# EAGLE board ADXL362_BOB_Panel_v10 (EAGLE 6.5.0), part 1 of 2
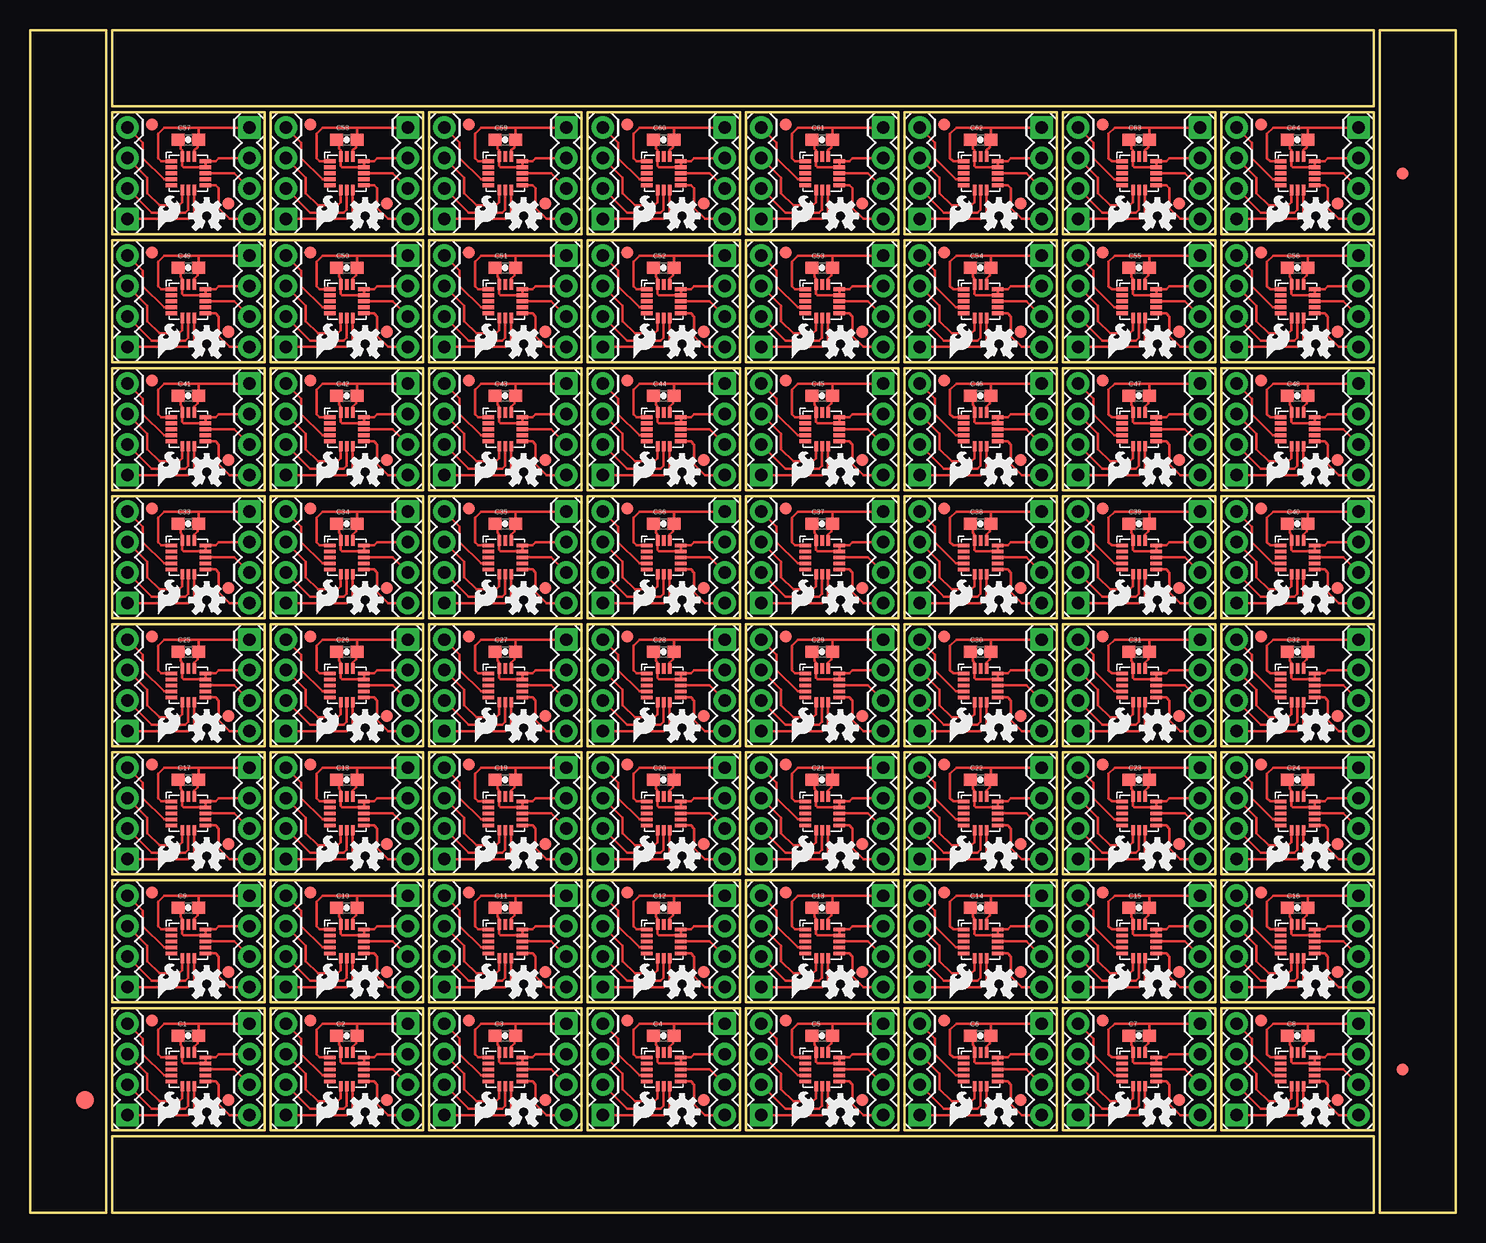
[diagram p0: board, top side]
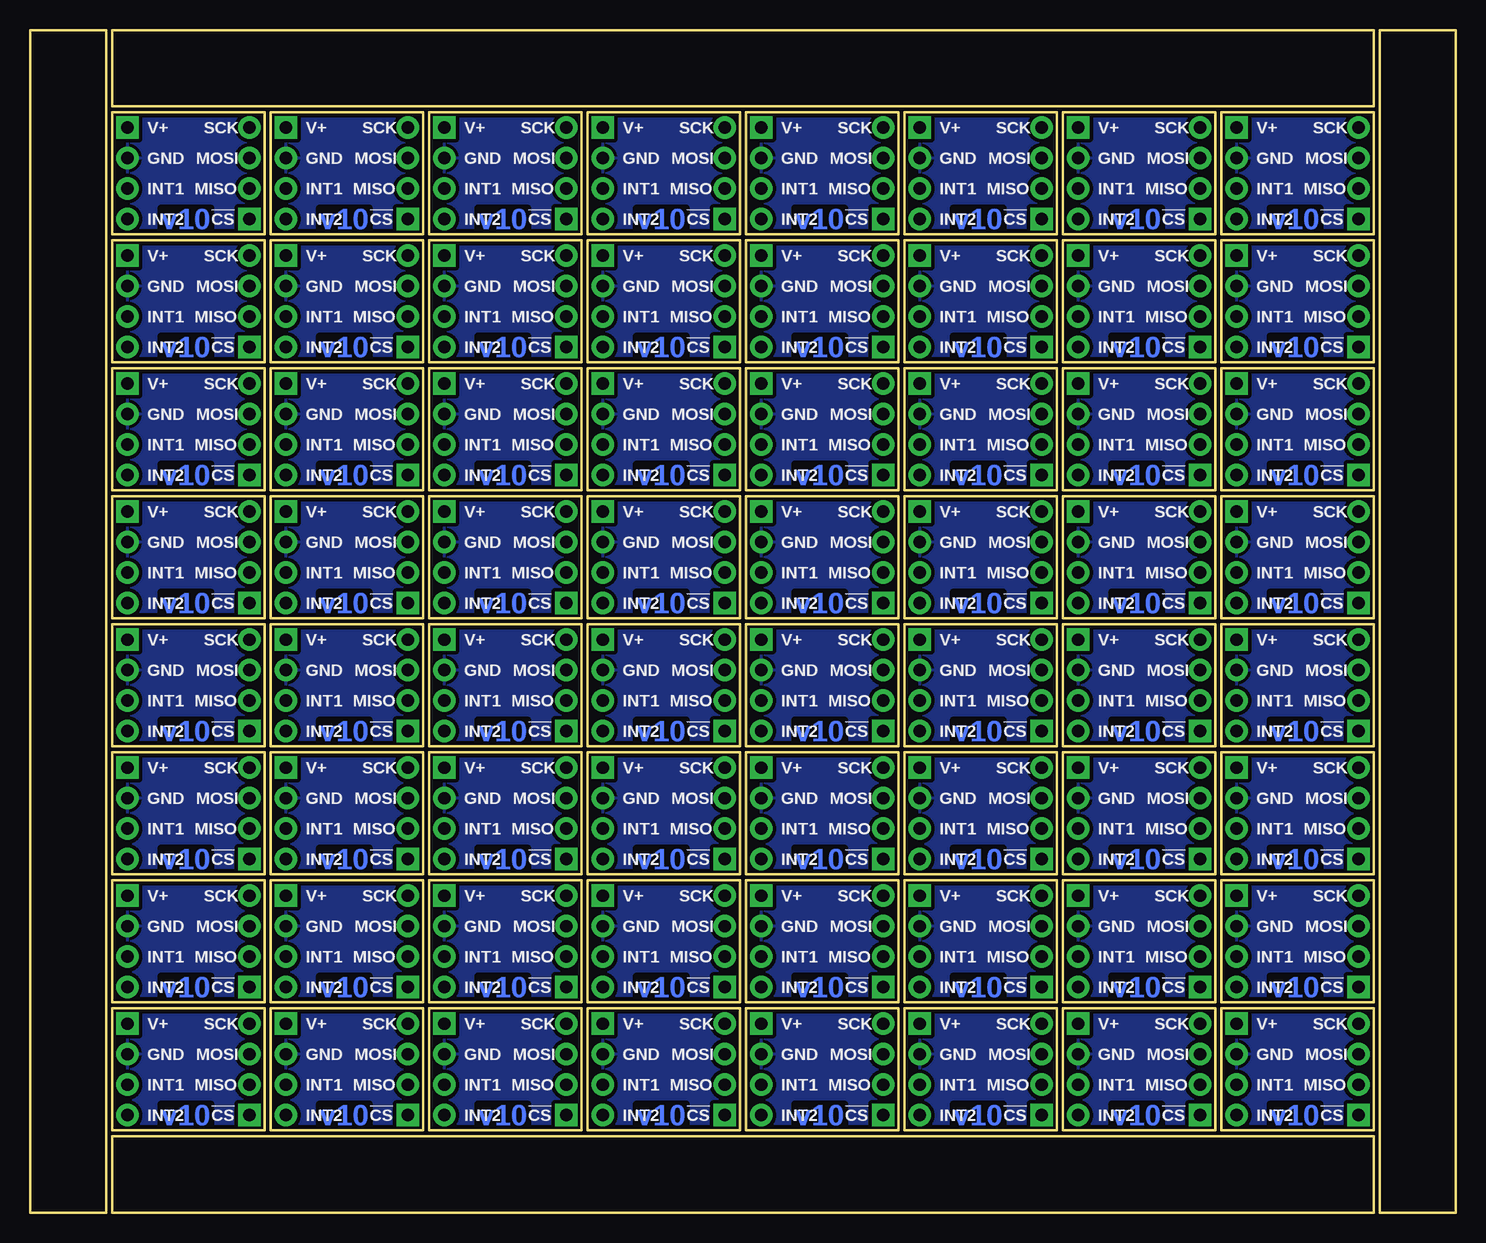
[diagram p1: board, bottom side, seen from below]

Size 118.87 x 98.55 mm. Coordinates in mm from the lower left corner, seen from the top.
Outline: 276 segments
Copper layers (1*16): Top 0.035mm / dielectric 1.5mm / Bottom 0.035mm
Design rules "SparkFun-2-layer": minimum track width 7mil, minimum drill 15mil, track to track 8mil, track to pad 8mil, pad to pad 8mil, via to via 8mil, smd to smd 8mil, copper to edge 8mil, drill to drill 8mil, minimum pad ring 12mil, minimum via ring 10mil, stop-mask expansion 4mil, vias tented up to drill 20mil, thermal gap 10mil

## Footprints (pad centres in the part's own frame; a part is rotated, then mirrored left to right if it is on the bottom)
0603-CAP = smd 1.1 x 1: 1 -0.85,0; 2 0.85,0
FIDUCIAL-1.5X3 = smd 1.5 x 1.5: 1 0,0
FIDUCIAL-1X2 = smd 1 x 1: 1 0,0
1X04 = drill 1.016 pad 1.88 square: 1 0,0 | drill 1.016 pad 1.88: 2 2.54,0; 3 5.08,0; 4 7.62,0
ADXL362-1:1 = smd 0.952 x 0.3: P$1 -1.426,1; P$2 -1.426,0.5; P$3 -1.426,0; P$4 -1.426,-0.5; P$5 -1.426,-1; P$9 1.426,-1; P$10 1.426,-0.5; P$11 1.426,0; P$12 1.426,0.5; P$13 1.426,1 | smd 0.3 x 0.851: P$6 -0.5,-1.402; P$7 0,-1.402; P$8 0.5,-1.402; P$14 0.5,1.402; P$15 0,1.402; P$16 -0.5,1.402

## Placement (x,y rotation side)
C1  .1uF  [0603-CAP]  13.21,14.73 0 top
C2  .1uF  [0603-CAP]  26.42,14.73 0 top
C3  .1uF  [0603-CAP]  39.62,14.73 0 top
C4  .1uF  [0603-CAP]  52.83,14.73 0 top
C5  .1uF  [0603-CAP]  66.04,14.73 0 top
C6  .1uF  [0603-CAP]  79.25,14.73 0 top
C7  .1uF  [0603-CAP]  92.46,14.73 0 top
C8  .1uF  [0603-CAP]  105.66,14.73 0 top
C9  .1uF  [0603-CAP]  13.21,25.4 0 top
C10  .1uF  [0603-CAP]  26.42,25.4 0 top
C11  .1uF  [0603-CAP]  39.62,25.4 0 top
C12  .1uF  [0603-CAP]  52.83,25.4 0 top
C13  .1uF  [0603-CAP]  66.04,25.4 0 top
C14  .1uF  [0603-CAP]  79.25,25.4 0 top
C15  .1uF  [0603-CAP]  92.46,25.4 0 top
C16  .1uF  [0603-CAP]  105.66,25.4 0 top
C17  .1uF  [0603-CAP]  13.21,36.07 0 top
C18  .1uF  [0603-CAP]  26.42,36.07 0 top
C19  .1uF  [0603-CAP]  39.62,36.07 0 top
C20  .1uF  [0603-CAP]  52.83,36.07 0 top
C21  .1uF  [0603-CAP]  66.04,36.07 0 top
C22  .1uF  [0603-CAP]  79.25,36.07 0 top
C23  .1uF  [0603-CAP]  92.46,36.07 0 top
C24  .1uF  [0603-CAP]  105.66,36.07 0 top
C25  .1uF  [0603-CAP]  13.21,46.74 0 top
C26  .1uF  [0603-CAP]  26.42,46.74 0 top
C27  .1uF  [0603-CAP]  39.62,46.74 0 top
C28  .1uF  [0603-CAP]  52.83,46.74 0 top
C29  .1uF  [0603-CAP]  66.04,46.74 0 top
C30  .1uF  [0603-CAP]  79.25,46.74 0 top
C31  .1uF  [0603-CAP]  92.46,46.74 0 top
C32  .1uF  [0603-CAP]  105.66,46.74 0 top
C33  .1uF  [0603-CAP]  13.21,57.4 0 top
C34  .1uF  [0603-CAP]  26.42,57.4 0 top
C35  .1uF  [0603-CAP]  39.62,57.4 0 top
C36  .1uF  [0603-CAP]  52.83,57.4 0 top
C37  .1uF  [0603-CAP]  66.04,57.4 0 top
C38  .1uF  [0603-CAP]  79.25,57.4 0 top
C39  .1uF  [0603-CAP]  92.46,57.4 0 top
C40  .1uF  [0603-CAP]  105.66,57.4 0 top
C41  .1uF  [0603-CAP]  13.21,68.07 0 top
C42  .1uF  [0603-CAP]  26.42,68.07 0 top
C43  .1uF  [0603-CAP]  39.62,68.07 0 top
C44  .1uF  [0603-CAP]  52.83,68.07 0 top
C45  .1uF  [0603-CAP]  66.04,68.07 0 top
C46  .1uF  [0603-CAP]  79.25,68.07 0 top
C47  .1uF  [0603-CAP]  92.46,68.07 0 top
C48  .1uF  [0603-CAP]  105.66,68.07 0 top
C49  .1uF  [0603-CAP]  13.21,78.74 0 top
C50  .1uF  [0603-CAP]  26.42,78.74 0 top
C51  .1uF  [0603-CAP]  39.62,78.74 0 top
C52  .1uF  [0603-CAP]  52.83,78.74 0 top
C53  .1uF  [0603-CAP]  66.04,78.74 0 top
C54  .1uF  [0603-CAP]  79.25,78.74 0 top
C55  .1uF  [0603-CAP]  92.46,78.74 0 top
C56  .1uF  [0603-CAP]  105.66,78.74 0 top
C57  .1uF  [0603-CAP]  13.21,89.41 0 top
C58  .1uF  [0603-CAP]  26.42,89.41 0 top
C59  .1uF  [0603-CAP]  39.62,89.41 0 top
C60  .1uF  [0603-CAP]  52.83,89.41 0 top
C61  .1uF  [0603-CAP]  66.04,89.41 0 top
C62  .1uF  [0603-CAP]  79.25,89.41 0 top
C63  .1uF  [0603-CAP]  92.46,89.41 0 top
C64  .1uF  [0603-CAP]  105.66,89.41 0 top
E$1  [FIDUCIAL-1.5X3]  4.57,9.4 0 top
E$4  [FIDUCIAL-1X2]  114.43,11.94 0 top
E$5  [FIDUCIAL-1X2]  114.43,86.61 180 top
FID1  FIDUCIAL1X2  [FIDUCIAL-1X2]  10.16,16 0 top
FID2  FIDUCIAL1X2  [FIDUCIAL-1X2]  16.54,9.4 0 top
FID3  FIDUCIAL1X2  [FIDUCIAL-1X2]  23.37,16 0 top
FID4  FIDUCIAL1X2  [FIDUCIAL-1X2]  29.74,9.4 0 top
FID5  FIDUCIAL1X2  [FIDUCIAL-1X2]  36.58,16 0 top
FID6  FIDUCIAL1X2  [FIDUCIAL-1X2]  42.95,9.4 0 top
FID7  FIDUCIAL1X2  [FIDUCIAL-1X2]  49.78,16 0 top
FID8  FIDUCIAL1X2  [FIDUCIAL-1X2]  56.16,9.4 0 top
FID9  FIDUCIAL1X2  [FIDUCIAL-1X2]  62.99,16 0 top
FID10  FIDUCIAL1X2  [FIDUCIAL-1X2]  69.37,9.4 0 top
FID11  FIDUCIAL1X2  [FIDUCIAL-1X2]  76.2,16 0 top
FID12  FIDUCIAL1X2  [FIDUCIAL-1X2]  82.58,9.4 0 top
FID13  FIDUCIAL1X2  [FIDUCIAL-1X2]  89.41,16 0 top
FID14  FIDUCIAL1X2  [FIDUCIAL-1X2]  95.78,9.4 0 top
FID15  FIDUCIAL1X2  [FIDUCIAL-1X2]  102.62,16 0 top
FID16  FIDUCIAL1X2  [FIDUCIAL-1X2]  108.99,9.4 0 top
FID17  FIDUCIAL1X2  [FIDUCIAL-1X2]  10.16,26.67 0 top
FID18  FIDUCIAL1X2  [FIDUCIAL-1X2]  16.54,20.07 0 top
FID19  FIDUCIAL1X2  [FIDUCIAL-1X2]  23.37,26.67 0 top
FID20  FIDUCIAL1X2  [FIDUCIAL-1X2]  29.74,20.07 0 top
FID21  FIDUCIAL1X2  [FIDUCIAL-1X2]  36.58,26.67 0 top
FID22  FIDUCIAL1X2  [FIDUCIAL-1X2]  42.95,20.07 0 top
FID23  FIDUCIAL1X2  [FIDUCIAL-1X2]  49.78,26.67 0 top
FID24  FIDUCIAL1X2  [FIDUCIAL-1X2]  56.16,20.07 0 top
FID25  FIDUCIAL1X2  [FIDUCIAL-1X2]  62.99,26.67 0 top
FID26  FIDUCIAL1X2  [FIDUCIAL-1X2]  69.37,20.07 0 top
FID27  FIDUCIAL1X2  [FIDUCIAL-1X2]  76.2,26.67 0 top
FID28  FIDUCIAL1X2  [FIDUCIAL-1X2]  82.58,20.07 0 top
FID29  FIDUCIAL1X2  [FIDUCIAL-1X2]  89.41,26.67 0 top
FID30  FIDUCIAL1X2  [FIDUCIAL-1X2]  95.78,20.07 0 top
FID31  FIDUCIAL1X2  [FIDUCIAL-1X2]  102.62,26.67 0 top
FID32  FIDUCIAL1X2  [FIDUCIAL-1X2]  108.99,20.07 0 top
FID33  FIDUCIAL1X2  [FIDUCIAL-1X2]  10.16,37.34 0 top
FID34  FIDUCIAL1X2  [FIDUCIAL-1X2]  16.54,30.73 0 top
FID35  FIDUCIAL1X2  [FIDUCIAL-1X2]  23.37,37.34 0 top
FID36  FIDUCIAL1X2  [FIDUCIAL-1X2]  29.74,30.73 0 top
FID37  FIDUCIAL1X2  [FIDUCIAL-1X2]  36.58,37.34 0 top
FID38  FIDUCIAL1X2  [FIDUCIAL-1X2]  42.95,30.73 0 top
FID39  FIDUCIAL1X2  [FIDUCIAL-1X2]  49.78,37.34 0 top
FID40  FIDUCIAL1X2  [FIDUCIAL-1X2]  56.16,30.73 0 top
FID41  FIDUCIAL1X2  [FIDUCIAL-1X2]  62.99,37.34 0 top
FID42  FIDUCIAL1X2  [FIDUCIAL-1X2]  69.37,30.73 0 top
FID43  FIDUCIAL1X2  [FIDUCIAL-1X2]  76.2,37.34 0 top
FID44  FIDUCIAL1X2  [FIDUCIAL-1X2]  82.58,30.73 0 top
FID45  FIDUCIAL1X2  [FIDUCIAL-1X2]  89.41,37.34 0 top
FID46  FIDUCIAL1X2  [FIDUCIAL-1X2]  95.78,30.73 0 top
FID47  FIDUCIAL1X2  [FIDUCIAL-1X2]  102.62,37.34 0 top
FID48  FIDUCIAL1X2  [FIDUCIAL-1X2]  108.99,30.73 0 top
FID49  FIDUCIAL1X2  [FIDUCIAL-1X2]  10.16,48.01 0 top
FID50  FIDUCIAL1X2  [FIDUCIAL-1X2]  16.54,41.4 0 top
FID51  FIDUCIAL1X2  [FIDUCIAL-1X2]  23.37,48.01 0 top
FID52  FIDUCIAL1X2  [FIDUCIAL-1X2]  29.74,41.4 0 top
FID53  FIDUCIAL1X2  [FIDUCIAL-1X2]  36.58,48.01 0 top
FID54  FIDUCIAL1X2  [FIDUCIAL-1X2]  42.95,41.4 0 top
FID55  FIDUCIAL1X2  [FIDUCIAL-1X2]  49.78,48.01 0 top
FID56  FIDUCIAL1X2  [FIDUCIAL-1X2]  56.16,41.4 0 top
FID57  FIDUCIAL1X2  [FIDUCIAL-1X2]  62.99,48.01 0 top
FID58  FIDUCIAL1X2  [FIDUCIAL-1X2]  69.37,41.4 0 top
FID59  FIDUCIAL1X2  [FIDUCIAL-1X2]  76.2,48.01 0 top
FID60  FIDUCIAL1X2  [FIDUCIAL-1X2]  82.58,41.4 0 top
FID61  FIDUCIAL1X2  [FIDUCIAL-1X2]  89.41,48.01 0 top
FID62  FIDUCIAL1X2  [FIDUCIAL-1X2]  95.78,41.4 0 top
FID63  FIDUCIAL1X2  [FIDUCIAL-1X2]  102.62,48.01 0 top
FID64  FIDUCIAL1X2  [FIDUCIAL-1X2]  108.99,41.4 0 top
FID65  FIDUCIAL1X2  [FIDUCIAL-1X2]  10.16,58.67 0 top
FID66  FIDUCIAL1X2  [FIDUCIAL-1X2]  16.54,52.07 0 top
FID67  FIDUCIAL1X2  [FIDUCIAL-1X2]  23.37,58.67 0 top
FID68  FIDUCIAL1X2  [FIDUCIAL-1X2]  29.74,52.07 0 top
FID69  FIDUCIAL1X2  [FIDUCIAL-1X2]  36.58,58.67 0 top
FID70  FIDUCIAL1X2  [FIDUCIAL-1X2]  42.95,52.07 0 top
FID71  FIDUCIAL1X2  [FIDUCIAL-1X2]  49.78,58.67 0 top
FID72  FIDUCIAL1X2  [FIDUCIAL-1X2]  56.16,52.07 0 top
FID73  FIDUCIAL1X2  [FIDUCIAL-1X2]  62.99,58.67 0 top
FID74  FIDUCIAL1X2  [FIDUCIAL-1X2]  69.37,52.07 0 top
FID75  FIDUCIAL1X2  [FIDUCIAL-1X2]  76.2,58.67 0 top
FID76  FIDUCIAL1X2  [FIDUCIAL-1X2]  82.58,52.07 0 top
FID77  FIDUCIAL1X2  [FIDUCIAL-1X2]  89.41,58.67 0 top
FID78  FIDUCIAL1X2  [FIDUCIAL-1X2]  95.78,52.07 0 top
FID79  FIDUCIAL1X2  [FIDUCIAL-1X2]  102.62,58.67 0 top
FID80  FIDUCIAL1X2  [FIDUCIAL-1X2]  108.99,52.07 0 top
FID81  FIDUCIAL1X2  [FIDUCIAL-1X2]  10.16,69.34 0 top
FID82  FIDUCIAL1X2  [FIDUCIAL-1X2]  16.54,62.74 0 top
FID83  FIDUCIAL1X2  [FIDUCIAL-1X2]  23.37,69.34 0 top
FID84  FIDUCIAL1X2  [FIDUCIAL-1X2]  29.74,62.74 0 top
FID85  FIDUCIAL1X2  [FIDUCIAL-1X2]  36.58,69.34 0 top
FID86  FIDUCIAL1X2  [FIDUCIAL-1X2]  42.95,62.74 0 top
FID87  FIDUCIAL1X2  [FIDUCIAL-1X2]  49.78,69.34 0 top
FID88  FIDUCIAL1X2  [FIDUCIAL-1X2]  56.16,62.74 0 top
FID89  FIDUCIAL1X2  [FIDUCIAL-1X2]  62.99,69.34 0 top
FID90  FIDUCIAL1X2  [FIDUCIAL-1X2]  69.37,62.74 0 top
FID91  FIDUCIAL1X2  [FIDUCIAL-1X2]  76.2,69.34 0 top
FID92  FIDUCIAL1X2  [FIDUCIAL-1X2]  82.58,62.74 0 top
FID93  FIDUCIAL1X2  [FIDUCIAL-1X2]  89.41,69.34 0 top
FID94  FIDUCIAL1X2  [FIDUCIAL-1X2]  95.78,62.74 0 top
FID95  FIDUCIAL1X2  [FIDUCIAL-1X2]  102.62,69.34 0 top
FID96  FIDUCIAL1X2  [FIDUCIAL-1X2]  108.99,62.74 0 top
FID97  FIDUCIAL1X2  [FIDUCIAL-1X2]  10.16,80.01 0 top
FID98  FIDUCIAL1X2  [FIDUCIAL-1X2]  16.54,73.41 0 top
FID99  FIDUCIAL1X2  [FIDUCIAL-1X2]  23.37,80.01 0 top
FID100  FIDUCIAL1X2  [FIDUCIAL-1X2]  29.74,73.41 0 top
FID101  FIDUCIAL1X2  [FIDUCIAL-1X2]  36.58,80.01 0 top
FID102  FIDUCIAL1X2  [FIDUCIAL-1X2]  42.95,73.41 0 top
FID103  FIDUCIAL1X2  [FIDUCIAL-1X2]  49.78,80.01 0 top
FID104  FIDUCIAL1X2  [FIDUCIAL-1X2]  56.16,73.41 0 top
FID105  FIDUCIAL1X2  [FIDUCIAL-1X2]  62.99,80.01 0 top
FID106  FIDUCIAL1X2  [FIDUCIAL-1X2]  69.37,73.41 0 top
FID107  FIDUCIAL1X2  [FIDUCIAL-1X2]  76.2,80.01 0 top
FID108  FIDUCIAL1X2  [FIDUCIAL-1X2]  82.58,73.41 0 top
FID109  FIDUCIAL1X2  [FIDUCIAL-1X2]  89.41,80.01 0 top
FID110  FIDUCIAL1X2  [FIDUCIAL-1X2]  95.78,73.41 0 top
FID111  FIDUCIAL1X2  [FIDUCIAL-1X2]  102.62,80.01 0 top
FID112  FIDUCIAL1X2  [FIDUCIAL-1X2]  108.99,73.41 0 top
FID113  FIDUCIAL1X2  [FIDUCIAL-1X2]  10.16,90.68 0 top
FID114  FIDUCIAL1X2  [FIDUCIAL-1X2]  16.54,84.07 0 top
FID115  FIDUCIAL1X2  [FIDUCIAL-1X2]  23.37,90.68 0 top
FID116  FIDUCIAL1X2  [FIDUCIAL-1X2]  29.74,84.07 0 top
FID117  FIDUCIAL1X2  [FIDUCIAL-1X2]  36.58,90.68 0 top
FID118  FIDUCIAL1X2  [FIDUCIAL-1X2]  42.95,84.07 0 top
FID119  FIDUCIAL1X2  [FIDUCIAL-1X2]  49.78,90.68 0 top
FID120  FIDUCIAL1X2  [FIDUCIAL-1X2]  56.16,84.07 0 top
FID121  FIDUCIAL1X2  [FIDUCIAL-1X2]  62.99,90.68 0 top
FID122  FIDUCIAL1X2  [FIDUCIAL-1X2]  69.37,84.07 0 top
FID123  FIDUCIAL1X2  [FIDUCIAL-1X2]  76.2,90.68 0 top
FID124  FIDUCIAL1X2  [FIDUCIAL-1X2]  82.58,84.07 0 top
FID125  FIDUCIAL1X2  [FIDUCIAL-1X2]  89.41,90.68 0 top
FID126  FIDUCIAL1X2  [FIDUCIAL-1X2]  95.78,84.07 0 top
FID127  FIDUCIAL1X2  [FIDUCIAL-1X2]  102.62,90.68 0 top
FID128  FIDUCIAL1X2  [FIDUCIAL-1X2]  108.99,84.07 0 top
JP1  [1X04]  8.13,8.13 90 top
JP2  [1X04]  18.29,15.75 270 top
JP3  LOGO-SFESK  [SFE-LOGO-FLAME]  10.67,7.24 0 top
JP4  [1X04]  21.34,8.13 90 top
JP5  [1X04]  31.5,15.75 270 top
JP6  LOGO-SFESK  [SFE-LOGO-FLAME]  23.88,7.24 0 top
JP7  [1X04]  34.54,8.13 90 top
JP8  [1X04]  44.7,15.75 270 top
JP9  LOGO-SFESK  [SFE-LOGO-FLAME]  37.08,7.24 0 top
JP10  [1X04]  47.75,8.13 90 top
JP11  [1X04]  57.91,15.75 270 top
JP12  LOGO-SFESK  [SFE-LOGO-FLAME]  50.29,7.24 0 top
JP13  [1X04]  60.96,8.13 90 top
JP14  [1X04]  71.12,15.75 270 top
JP15  LOGO-SFESK  [SFE-LOGO-FLAME]  63.5,7.24 0 top
JP16  [1X04]  74.17,8.13 90 top
JP17  [1X04]  84.33,15.75 270 top
JP18  LOGO-SFESK  [SFE-LOGO-FLAME]  76.71,7.24 0 top
JP19  [1X04]  87.38,8.13 90 top
JP20  [1X04]  97.54,15.75 270 top
JP21  LOGO-SFESK  [SFE-LOGO-FLAME]  89.92,7.24 0 top
JP22  [1X04]  100.58,8.13 90 top
JP23  [1X04]  110.74,15.75 270 top
JP24  LOGO-SFESK  [SFE-LOGO-FLAME]  103.12,7.24 0 top
JP25  [1X04]  8.13,18.8 90 top
JP26  [1X04]  18.29,26.42 270 top
JP27  LOGO-SFESK  [SFE-LOGO-FLAME]  10.67,17.91 0 top
JP28  [1X04]  21.34,18.8 90 top
JP29  [1X04]  31.5,26.42 270 top
JP30  LOGO-SFESK  [SFE-LOGO-FLAME]  23.88,17.91 0 top
JP31  [1X04]  34.54,18.8 90 top
JP32  [1X04]  44.7,26.42 270 top
JP33  LOGO-SFESK  [SFE-LOGO-FLAME]  37.08,17.91 0 top
JP34  [1X04]  47.75,18.8 90 top
JP35  [1X04]  57.91,26.42 270 top
JP36  LOGO-SFESK  [SFE-LOGO-FLAME]  50.29,17.91 0 top
JP37  [1X04]  60.96,18.8 90 top
JP38  [1X04]  71.12,26.42 270 top
JP39  LOGO-SFESK  [SFE-LOGO-FLAME]  63.5,17.91 0 top
JP40  [1X04]  74.17,18.8 90 top
JP41  [1X04]  84.33,26.42 270 top
JP42  LOGO-SFESK  [SFE-LOGO-FLAME]  76.71,17.91 0 top
JP43  [1X04]  87.38,18.8 90 top
JP44  [1X04]  97.54,26.42 270 top
JP45  LOGO-SFESK  [SFE-LOGO-FLAME]  89.92,17.91 0 top
JP46  [1X04]  100.58,18.8 90 top
JP47  [1X04]  110.74,26.42 270 top
JP48  LOGO-SFESK  [SFE-LOGO-FLAME]  103.12,17.91 0 top
JP49  [1X04]  8.13,29.46 90 top
JP50  [1X04]  18.29,37.08 270 top
JP51  LOGO-SFESK  [SFE-LOGO-FLAME]  10.67,28.57 0 top
JP52  [1X04]  21.34,29.46 90 top
JP53  [1X04]  31.5,37.08 270 top
JP54  LOGO-SFESK  [SFE-LOGO-FLAME]  23.88,28.57 0 top
JP55  [1X04]  34.54,29.46 90 top
JP56  [1X04]  44.7,37.08 270 top
JP57  LOGO-SFESK  [SFE-LOGO-FLAME]  37.08,28.57 0 top
JP58  [1X04]  47.75,29.46 90 top
JP59  [1X04]  57.91,37.08 270 top
JP60  LOGO-SFESK  [SFE-LOGO-FLAME]  50.29,28.57 0 top
JP61  [1X04]  60.96,29.46 90 top
JP62  [1X04]  71.12,37.08 270 top
JP63  LOGO-SFESK  [SFE-LOGO-FLAME]  63.5,28.57 0 top
JP64  [1X04]  74.17,29.46 90 top
JP65  [1X04]  84.33,37.08 270 top
JP66  LOGO-SFESK  [SFE-LOGO-FLAME]  76.71,28.57 0 top
JP67  [1X04]  87.38,29.46 90 top
JP68  [1X04]  97.54,37.08 270 top
JP69  LOGO-SFESK  [SFE-LOGO-FLAME]  89.92,28.57 0 top
JP70  [1X04]  100.58,29.46 90 top
JP71  [1X04]  110.74,37.08 270 top
JP72  LOGO-SFESK  [SFE-LOGO-FLAME]  103.12,28.57 0 top
JP73  [1X04]  8.13,40.13 90 top
JP74  [1X04]  18.29,47.75 270 top
JP75  LOGO-SFESK  [SFE-LOGO-FLAME]  10.67,39.24 0 top
JP76  [1X04]  21.34,40.13 90 top
JP77  [1X04]  31.5,47.75 270 top
JP78  LOGO-SFESK  [SFE-LOGO-FLAME]  23.88,39.24 0 top
JP79  [1X04]  34.54,40.13 90 top
JP80  [1X04]  44.7,47.75 270 top
JP81  LOGO-SFESK  [SFE-LOGO-FLAME]  37.08,39.24 0 top
JP82  [1X04]  47.75,40.13 90 top
JP83  [1X04]  57.91,47.75 270 top
JP84  LOGO-SFESK  [SFE-LOGO-FLAME]  50.29,39.24 0 top
JP85  [1X04]  60.96,40.13 90 top
JP86  [1X04]  71.12,47.75 270 top
JP87  LOGO-SFESK  [SFE-LOGO-FLAME]  63.5,39.24 0 top
JP88  [1X04]  74.17,40.13 90 top
JP89  [1X04]  84.33,47.75 270 top
JP90  LOGO-SFESK  [SFE-LOGO-FLAME]  76.71,39.24 0 top
JP91  [1X04]  87.38,40.13 90 top
JP92  [1X04]  97.54,47.75 270 top
JP93  LOGO-SFESK  [SFE-LOGO-FLAME]  89.92,39.24 0 top
JP94  [1X04]  100.58,40.13 90 top
JP95  [1X04]  110.74,47.75 270 top
JP96  LOGO-SFESK  [SFE-LOGO-FLAME]  103.12,39.24 0 top
JP97  [1X04]  8.13,50.8 90 top
JP98  [1X04]  18.29,58.42 270 top
JP99  LOGO-SFESK  [SFE-LOGO-FLAME]  10.67,49.91 0 top
JP100  [1X04]  21.34,50.8 90 top
JP101  [1X04]  31.5,58.42 270 top
JP102  LOGO-SFESK  [SFE-LOGO-FLAME]  23.88,49.91 0 top
JP103  [1X04]  34.54,50.8 90 top
JP104  [1X04]  44.7,58.42 270 top
JP105  LOGO-SFESK  [SFE-LOGO-FLAME]  37.08,49.91 0 top
JP106  [1X04]  47.75,50.8 90 top
JP107  [1X04]  57.91,58.42 270 top
JP108  LOGO-SFESK  [SFE-LOGO-FLAME]  50.29,49.91 0 top
JP109  [1X04]  60.96,50.8 90 top
JP110  [1X04]  71.12,58.42 270 top
JP111  LOGO-SFESK  [SFE-LOGO-FLAME]  63.5,49.91 0 top
JP112  [1X04]  74.17,50.8 90 top
JP113  [1X04]  84.33,58.42 270 top
JP114  LOGO-SFESK  [SFE-LOGO-FLAME]  76.71,49.91 0 top
JP115  [1X04]  87.38,50.8 90 top
JP116  [1X04]  97.54,58.42 270 top
JP117  LOGO-SFESK  [SFE-LOGO-FLAME]  89.92,49.91 0 top
JP118  [1X04]  100.58,50.8 90 top
JP119  [1X04]  110.74,58.42 270 top
JP120  LOGO-SFESK  [SFE-LOGO-FLAME]  103.12,49.91 0 top
JP121  [1X04]  8.13,61.47 90 top
JP122  [1X04]  18.29,69.09 270 top
JP123  LOGO-SFESK  [SFE-LOGO-FLAME]  10.67,60.58 0 top
JP124  [1X04]  21.34,61.47 90 top
JP125  [1X04]  31.5,69.09 270 top
JP126  LOGO-SFESK  [SFE-LOGO-FLAME]  23.88,60.58 0 top
JP127  [1X04]  34.54,61.47 90 top
JP128  [1X04]  44.7,69.09 270 top
JP129  LOGO-SFESK  [SFE-LOGO-FLAME]  37.08,60.58 0 top
JP130  [1X04]  47.75,61.47 90 top
JP131  [1X04]  57.91,69.09 270 top
JP132  LOGO-SFESK  [SFE-LOGO-FLAME]  50.29,60.58 0 top
JP133  [1X04]  60.96,61.47 90 top
JP134  [1X04]  71.12,69.09 270 top
JP135  LOGO-SFESK  [SFE-LOGO-FLAME]  63.5,60.58 0 top
JP136  [1X04]  74.17,61.47 90 top
JP137  [1X04]  84.33,69.09 270 top
JP138  LOGO-SFESK  [SFE-LOGO-FLAME]  76.71,60.58 0 top
JP139  [1X04]  87.38,61.47 90 top
JP140  [1X04]  97.54,69.09 270 top
JP141  LOGO-SFESK  [SFE-LOGO-FLAME]  89.92,60.58 0 top
JP142  [1X04]  100.58,61.47 90 top
JP143  [1X04]  110.74,69.09 270 top
JP144  LOGO-SFESK  [SFE-LOGO-FLAME]  103.12,60.58 0 top
JP145  [1X04]  8.13,72.14 90 top
JP146  [1X04]  18.29,79.76 270 top
JP147  LOGO-SFESK  [SFE-LOGO-FLAME]  10.67,71.25 0 top
JP148  [1X04]  21.34,72.14 90 top
JP149  [1X04]  31.5,79.76 270 top
JP150  LOGO-SFESK  [SFE-LOGO-FLAME]  23.88,71.25 0 top
JP151  [1X04]  34.54,72.14 90 top
JP152  [1X04]  44.7,79.76 270 top
JP153  LOGO-SFESK  [SFE-LOGO-FLAME]  37.08,71.25 0 top
JP154  [1X04]  47.75,72.14 90 top
JP155  [1X04]  57.91,79.76 270 top
JP156  LOGO-SFESK  [SFE-LOGO-FLAME]  50.29,71.25 0 top
JP157  [1X04]  60.96,72.14 90 top
JP158  [1X04]  71.12,79.76 270 top
JP159  LOGO-SFESK  [SFE-LOGO-FLAME]  63.5,71.25 0 top
JP160  [1X04]  74.17,72.14 90 top
JP161  [1X04]  84.33,79.76 270 top
JP162  LOGO-SFESK  [SFE-LOGO-FLAME]  76.71,71.25 0 top
JP163  [1X04]  87.38,72.14 90 top
JP164  [1X04]  97.54,79.76 270 top
JP165  LOGO-SFESK  [SFE-LOGO-FLAME]  89.92,71.25 0 top
JP166  [1X04]  100.58,72.14 90 top
JP167  [1X04]  110.74,79.76 270 top
JP168  LOGO-SFESK  [SFE-LOGO-FLAME]  103.12,71.25 0 top
JP169  [1X04]  8.13,82.8 90 top
JP170  [1X04]  18.29,90.42 270 top
JP171  LOGO-SFESK  [SFE-LOGO-FLAME]  10.67,81.92 0 top
JP172  [1X04]  21.34,82.8 90 top
JP173  [1X04]  31.5,90.42 270 top
JP174  LOGO-SFESK  [SFE-LOGO-FLAME]  23.88,81.92 0 top
JP175  [1X04]  34.54,82.8 90 top
JP176  [1X04]  44.7,90.42 270 top
JP177  LOGO-SFESK  [SFE-LOGO-FLAME]  37.08,81.92 0 top
JP178  [1X04]  47.75,82.8 90 top
JP179  [1X04]  57.91,90.42 270 top
JP180  LOGO-SFESK  [SFE-LOGO-FLAME]  50.29,81.92 0 top
JP181  [1X04]  60.96,82.8 90 top
JP182  [1X04]  71.12,90.42 270 top
JP183  LOGO-SFESK  [SFE-LOGO-FLAME]  63.5,81.92 0 top
JP184  [1X04]  74.17,82.8 90 top
JP185  [1X04]  84.33,90.42 270 top
JP186  LOGO-SFESK  [SFE-LOGO-FLAME]  76.71,81.92 0 top
JP187  [1X04]  87.38,82.8 90 top
JP188  [1X04]  97.54,90.42 270 top
JP189  LOGO-SFESK  [SFE-LOGO-FLAME]  89.92,81.92 0 top
JP190  [1X04]  100.58,82.8 90 top
JP191  [1X04]  110.74,90.42 270 top
JP192  LOGO-SFESK  [SFE-LOGO-FLAME]  103.12,81.92 0 top
U1  [ADXL362-1:1]  13.21,11.94 0 top
U2  [ADXL362-1:1]  26.42,11.94 0 top
U3  [ADXL362-1:1]  39.62,11.94 0 top
U4  [ADXL362-1:1]  52.83,11.94 0 top
U5  [ADXL362-1:1]  66.04,11.94 0 top
U6  [ADXL362-1:1]  79.25,11.94 0 top
U7  [ADXL362-1:1]  92.46,11.94 0 top
U8  [ADXL362-1:1]  105.66,11.94 0 top
U9  [ADXL362-1:1]  13.21,22.61 0 top
U10  [ADXL362-1:1]  26.42,22.61 0 top
U11  [ADXL362-1:1]  39.62,22.61 0 top
U12  [ADXL362-1:1]  52.83,22.61 0 top
U13  [ADXL362-1:1]  66.04,22.61 0 top
U14  [ADXL362-1:1]  79.25,22.61 0 top
U15  [ADXL362-1:1]  92.46,22.61 0 top
U16  [ADXL362-1:1]  105.66,22.61 0 top
U17  [ADXL362-1:1]  13.21,33.27 0 top
U18  [ADXL362-1:1]  26.42,33.27 0 top
U19  [ADXL362-1:1]  39.62,33.27 0 top
U20  [ADXL362-1:1]  52.83,33.27 0 top
U21  [ADXL362-1:1]  66.04,33.27 0 top
U22  [ADXL362-1:1]  79.25,33.27 0 top
U23  [ADXL362-1:1]  92.46,33.27 0 top
U24  [ADXL362-1:1]  105.66,33.27 0 top
U25  [ADXL362-1:1]  13.21,43.94 0 top
U26  [ADXL362-1:1]  26.42,43.94 0 top
U27  [ADXL362-1:1]  39.62,43.94 0 top
U28  [ADXL362-1:1]  52.83,43.94 0 top
U29  [ADXL362-1:1]  66.04,43.94 0 top
U30  [ADXL362-1:1]  79.25,43.94 0 top
U31  [ADXL362-1:1]  92.46,43.94 0 top
U32  [ADXL362-1:1]  105.66,43.94 0 top
U33  [ADXL362-1:1]  13.21,54.61 0 top
U34  [ADXL362-1:1]  26.42,54.61 0 top
U35  [ADXL362-1:1]  39.62,54.61 0 top
U36  [ADXL362-1:1]  52.83,54.61 0 top
U37  [ADXL362-1:1]  66.04,54.61 0 top
U38  [ADXL362-1:1]  79.25,54.61 0 top
U39  [ADXL362-1:1]  92.46,54.61 0 top
U40  [ADXL362-1:1]  105.66,54.61 0 top
U41  [ADXL362-1:1]  13.21,65.28 0 top
U42  [ADXL362-1:1]  26.42,65.28 0 top
U43  [ADXL362-1:1]  39.62,65.28 0 top
U44  [ADXL362-1:1]  52.83,65.28 0 top
U45  [ADXL362-1:1]  66.04,65.28 0 top
U46  [ADXL362-1:1]  79.25,65.28 0 top
U47  [ADXL362-1:1]  92.46,65.28 0 top
U48  [ADXL362-1:1]  105.66,65.28 0 top
U49  [ADXL362-1:1]  13.21,75.95 0 top
U50  [ADXL362-1:1]  26.42,75.95 0 top
U51  [ADXL362-1:1]  39.62,75.95 0 top
U52  [ADXL362-1:1]  52.83,75.95 0 top
U53  [ADXL362-1:1]  66.04,75.95 0 top
U54  [ADXL362-1:1]  79.25,75.95 0 top
U55  [ADXL362-1:1]  92.46,75.95 0 top
U56  [ADXL362-1:1]  105.66,75.95 0 top
U57  [ADXL362-1:1]  13.21,86.61 0 top
U58  [ADXL362-1:1]  26.42,86.61 0 top
U59  [ADXL362-1:1]  39.62,86.61 0 top
U60  [ADXL362-1:1]  52.83,86.61 0 top
U61  [ADXL362-1:1]  66.04,86.61 0 top
U62  [ADXL362-1:1]  79.25,86.61 0 top
U63  [ADXL362-1:1]  92.46,86.61 0 top
U64  [ADXL362-1:1]  105.66,86.61 0 top
U$1  OSHW-LOGOS  [OSHW-LOGO-S]  14.73,8.38 0 top
U$2  OSHW-LOGOS  [OSHW-LOGO-S]  27.94,8.38 0 top
U$3  OSHW-LOGOS  [OSHW-LOGO-S]  41.15,8.38 0 top
U$4  OSHW-LOGOS  [OSHW-LOGO-S]  54.36,8.38 0 top
U$5  OSHW-LOGOS  [OSHW-LOGO-S]  67.56,8.38 0 top
U$6  OSHW-LOGOS  [OSHW-LOGO-S]  80.77,8.38 0 top
U$7  OSHW-LOGOS  [OSHW-LOGO-S]  93.98,8.38 0 top
U$8  OSHW-LOGOS  [OSHW-LOGO-S]  107.19,8.38 0 top
U$9  OSHW-LOGOS  [OSHW-LOGO-S]  14.73,19.05 0 top
U$10  OSHW-LOGOS  [OSHW-LOGO-S]  27.94,19.05 0 top
U$11  OSHW-LOGOS  [OSHW-LOGO-S]  41.15,19.05 0 top
U$12  OSHW-LOGOS  [OSHW-LOGO-S]  54.36,19.05 0 top
U$13  OSHW-LOGOS  [OSHW-LOGO-S]  67.56,19.05 0 top
U$14  OSHW-LOGOS  [OSHW-LOGO-S]  80.77,19.05 0 top
U$15  OSHW-LOGOS  [OSHW-LOGO-S]  93.98,19.05 0 top
U$16  OSHW-LOGOS  [OSHW-LOGO-S]  107.19,19.05 0 top
U$17  OSHW-LOGOS  [OSHW-LOGO-S]  14.73,29.72 0 top
U$18  OSHW-LOGOS  [OSHW-LOGO-S]  27.94,29.72 0 top
U$19  OSHW-LOGOS  [OSHW-LOGO-S]  41.15,29.72 0 top
U$20  OSHW-LOGOS  [OSHW-LOGO-S]  54.36,29.72 0 top
U$21  OSHW-LOGOS  [OSHW-LOGO-S]  67.56,29.72 0 top
U$22  OSHW-LOGOS  [OSHW-LOGO-S]  80.77,29.72 0 top
U$23  OSHW-LOGOS  [OSHW-LOGO-S]  93.98,29.72 0 top
U$24  OSHW-LOGOS  [OSHW-LOGO-S]  107.19,29.72 0 top
U$25  OSHW-LOGOS  [OSHW-LOGO-S]  14.73,40.39 0 top
U$26  OSHW-LOGOS  [OSHW-LOGO-S]  27.94,40.39 0 top
U$27  OSHW-LOGOS  [OSHW-LOGO-S]  41.15,40.39 0 top
U$28  OSHW-LOGOS  [OSHW-LOGO-S]  54.36,40.39 0 top
U$29  OSHW-LOGOS  [OSHW-LOGO-S]  67.56,40.39 0 top
U$30  OSHW-LOGOS  [OSHW-LOGO-S]  80.77,40.39 0 top
U$31  OSHW-LOGOS  [OSHW-LOGO-S]  93.98,40.39 0 top
U$32  OSHW-LOGOS  [OSHW-LOGO-S]  107.19,40.39 0 top
U$33  OSHW-LOGOS  [OSHW-LOGO-S]  14.73,51.05 0 top
U$34  OSHW-LOGOS  [OSHW-LOGO-S]  27.94,51.05 0 top
U$35  OSHW-LOGOS  [OSHW-LOGO-S]  41.15,51.05 0 top
U$36  OSHW-LOGOS  [OSHW-LOGO-S]  54.36,51.05 0 top
U$37  OSHW-LOGOS  [OSHW-LOGO-S]  67.56,51.05 0 top
U$38  OSHW-LOGOS  [OSHW-LOGO-S]  80.77,51.05 0 top
U$39  OSHW-LOGOS  [OSHW-LOGO-S]  93.98,51.05 0 top
U$40  OSHW-LOGOS  [OSHW-LOGO-S]  107.19,51.05 0 top
U$41  OSHW-LOGOS  [OSHW-LOGO-S]  14.73,61.72 0 top
U$42  OSHW-LOGOS  [OSHW-LOGO-S]  27.94,61.72 0 top
U$43  OSHW-LOGOS  [OSHW-LOGO-S]  41.15,61.72 0 top
U$44  OSHW-LOGOS  [OSHW-LOGO-S]  54.36,61.72 0 top
U$45  OSHW-LOGOS  [OSHW-LOGO-S]  67.56,61.72 0 top
U$46  OSHW-LOGOS  [OSHW-LOGO-S]  80.77,61.72 0 top
U$47  OSHW-LOGOS  [OSHW-LOGO-S]  93.98,61.72 0 top
U$48  OSHW-LOGOS  [OSHW-LOGO-S]  107.19,61.72 0 top
U$49  OSHW-LOGOS  [OSHW-LOGO-S]  14.73,72.39 0 top
U$50  OSHW-LOGOS  [OSHW-LOGO-S]  27.94,72.39 0 top
U$51  OSHW-LOGOS  [OSHW-LOGO-S]  41.15,72.39 0 top
U$52  OSHW-LOGOS  [OSHW-LOGO-S]  54.36,72.39 0 top
U$53  OSHW-LOGOS  [OSHW-LOGO-S]  67.56,72.39 0 top
U$54  OSHW-LOGOS  [OSHW-LOGO-S]  80.77,72.39 0 top
U$55  OSHW-LOGOS  [OSHW-LOGO-S]  93.98,72.39 0 top
U$56  OSHW-LOGOS  [OSHW-LOGO-S]  107.19,72.39 0 top
U$57  OSHW-LOGOS  [OSHW-LOGO-S]  14.73,83.06 0 top
U$58  OSHW-LOGOS  [OSHW-LOGO-S]  27.94,83.06 0 top
U$59  OSHW-LOGOS  [OSHW-LOGO-S]  41.15,83.06 0 top
U$60  OSHW-LOGOS  [OSHW-LOGO-S]  54.36,83.06 0 top
U$61  OSHW-LOGOS  [OSHW-LOGO-S]  67.56,83.06 0 top
U$62  OSHW-LOGOS  [OSHW-LOGO-S]  80.77,83.06 0 top
U$63  OSHW-LOGOS  [OSHW-LOGO-S]  93.98,83.06 0 top
U$64  OSHW-LOGOS  [OSHW-LOGO-S]  107.19,83.06 0 top

## Library data of the parts
C1-C64 = SparkFun-Capacitors; PROD_ID: CAP-00810
E$1 E$4 E$5 FID1-FID128 JP3 JP6 JP9 JP12 JP15 JP18 JP21 JP24 JP27 JP30 JP33 JP36 JP39 JP42 JP45 JP48 JP51 JP54 JP57 JP60 JP63 JP66 JP69 JP72 JP75 JP78 JP81 JP84 JP87 JP90 JP93 JP96 JP99 JP102 JP105 JP108 JP111 JP114 JP117 JP120 JP123 JP126 JP129 JP132 JP135 JP138 JP141 JP144 JP147 JP150 JP153 JP156 JP159 JP162 JP165 JP168 JP171 JP174 JP177 JP180 JP183 JP186 JP189 JP192 U$1-U$64 = SparkFun-Aesthetics
JP1 JP2 JP4 JP5 JP7 JP8 JP10 JP11 JP13 JP14 JP16 JP17 JP19 JP20 JP22 JP23 JP25 JP26 JP28 JP29 JP31 JP32 JP34 JP35 JP37 JP38 JP40 JP41 JP43 JP44 JP46 JP47 JP49 JP50 JP52 JP53 JP55 JP56 JP58 JP59 JP61 JP62 JP64 JP65 JP67 JP68 JP70 JP71 JP73 JP74 JP76 JP77 JP79 JP80 JP82 JP83 JP85 JP86 JP88 JP89 JP91 JP92 JP94 JP95 JP97 JP98 JP100 JP101 JP103 JP104 JP106 JP107 JP109 JP110 JP112 JP113 JP115 JP116 JP118 JP119 JP121 JP122 JP124 JP125 JP127 JP128 JP130 JP131 JP133 JP134 JP136 JP137 JP139 JP140 JP142 JP143 JP145 JP146 JP148 JP149 JP151 JP152 JP154 JP155 JP157 JP158 JP160 JP161 JP163 JP164 JP166 JP167 JP169 JP170 JP172 JP173 JP175 JP176 JP178 JP179 JP181 JP182 JP184 JP185 JP187 JP188 JP190 JP191 = SparkFun-Connectors
U1-U64 = SparkFun-Sensors

## Nets
3.3V: C1.2 JP2.1 U1.P$1 U1.P$14
3.3V1: C2.2 JP5.1 U2.P$1 U2.P$14
3.3V2: C3.2 JP8.1 U3.P$1 U3.P$14
3.3V3: C4.2 JP11.1 U4.P$1 U4.P$14
3.3V4: C5.2 JP14.1 U5.P$1 U5.P$14
3.3V5: C6.2 JP17.1 U6.P$1 U6.P$14
3.3V6: C7.2 JP20.1 U7.P$1 U7.P$14
3.3V7: C8.2 JP23.1 U8.P$1 U8.P$14
3.3V8: C9.2 JP26.1 U9.P$1 U9.P$14
3.3V9: C10.2 JP29.1 U10.P$1 U10.P$14
3.3V10: C11.2 JP32.1 U11.P$1 U11.P$14
3.3V11: C12.2 JP35.1 U12.P$1 U12.P$14
3.3V12: C13.2 JP38.1 U13.P$1 U13.P$14
3.3V13: C14.2 JP41.1 U14.P$1 U14.P$14
3.3V14: C15.2 JP44.1 U15.P$1 U15.P$14
3.3V15: C16.2 JP47.1 U16.P$1 U16.P$14
3.3V16: C17.2 JP50.1 U17.P$1 U17.P$14
3.3V17: C18.2 JP53.1 U18.P$1 U18.P$14
3.3V18: C19.2 JP56.1 U19.P$1 U19.P$14
3.3V19: C20.2 JP59.1 U20.P$1 U20.P$14
3.3V20: C21.2 JP62.1 U21.P$1 U21.P$14
3.3V21: C22.2 JP65.1 U22.P$1 U22.P$14
3.3V22: C23.2 JP68.1 U23.P$1 U23.P$14
3.3V23: C24.2 JP71.1 U24.P$1 U24.P$14
3.3V24: C25.2 JP74.1 U25.P$1 U25.P$14
3.3V25: C26.2 JP77.1 U26.P$1 U26.P$14
3.3V26: C27.2 JP80.1 U27.P$1 U27.P$14
3.3V27: C28.2 JP83.1 U28.P$1 U28.P$14
3.3V28: C29.2 JP86.1 U29.P$1 U29.P$14
3.3V29: C30.2 JP89.1 U30.P$1 U30.P$14
3.3V30: C31.2 JP92.1 U31.P$1 U31.P$14
3.3V31: C32.2 JP95.1 U32.P$1 U32.P$14
3.3V32: C33.2 JP98.1 U33.P$1 U33.P$14
3.3V33: C34.2 JP101.1 U34.P$1 U34.P$14
3.3V34: C35.2 JP104.1 U35.P$1 U35.P$14
3.3V35: C36.2 JP107.1 U36.P$1 U36.P$14
3.3V36: C37.2 JP110.1 U37.P$1 U37.P$14
3.3V37: C38.2 JP113.1 U38.P$1 U38.P$14
3.3V38: C39.2 JP116.1 U39.P$1 U39.P$14
3.3V39: C40.2 JP119.1 U40.P$1 U40.P$14
3.3V40: C41.2 JP122.1 U41.P$1 U41.P$14
3.3V41: C42.2 JP125.1 U42.P$1 U42.P$14
3.3V42: C43.2 JP128.1 U43.P$1 U43.P$14
3.3V43: C44.2 JP131.1 U44.P$1 U44.P$14
3.3V44: C45.2 JP134.1 U45.P$1 U45.P$14
3.3V45: C46.2 JP137.1 U46.P$1 U46.P$14
3.3V46: C47.2 JP140.1 U47.P$1 U47.P$14
3.3V47: C48.2 JP143.1 U48.P$1 U48.P$14
3.3V48: C49.2 JP146.1 U49.P$1 U49.P$14
3.3V49: C50.2 JP149.1 U50.P$1 U50.P$14
3.3V50: C51.2 JP152.1 U51.P$1 U51.P$14
3.3V51: C52.2 JP155.1 U52.P$1 U52.P$14
3.3V52: C53.2 JP158.1 U53.P$1 U53.P$14
3.3V53: C54.2 JP161.1 U54.P$1 U54.P$14
3.3V54: C55.2 JP164.1 U55.P$1 U55.P$14
3.3V55: C56.2 JP167.1 U56.P$1 U56.P$14
3.3V56: C57.2 JP170.1 U57.P$1 U57.P$14
3.3V57: C58.2 JP173.1 U58.P$1 U58.P$14
3.3V58: C59.2 JP176.1 U59.P$1 U59.P$14
3.3V59: C60.2 JP179.1 U60.P$1 U60.P$14
3.3V60: C61.2 JP182.1 U61.P$1 U61.P$14
3.3V61: C62.2 JP185.1 U62.P$1 U62.P$14
3.3V62: C63.2 JP188.1 U63.P$1 U63.P$14
3.3V63: C64.2 JP191.1 U64.P$1 U64.P$14
GND: C1.1 JP2.2 U1.P$12 U1.P$13 U1.P$16
GND1: C2.1 JP5.2 U2.P$12 U2.P$13 U2.P$16
GND2: C3.1 JP8.2 U3.P$12 U3.P$13 U3.P$16
GND3: C4.1 JP11.2 U4.P$12 U4.P$13 U4.P$16
GND4: C5.1 JP14.2 U5.P$12 U5.P$13 U5.P$16
GND5: C6.1 JP17.2 U6.P$12 U6.P$13 U6.P$16
GND6: C7.1 JP20.2 U7.P$12 U7.P$13 U7.P$16
GND7: C8.1 JP23.2 U8.P$12 U8.P$13 U8.P$16
GND8: C9.1 JP26.2 U9.P$12 U9.P$13 U9.P$16
GND9: C10.1 JP29.2 U10.P$12 U10.P$13 U10.P$16
GND10: C11.1 JP32.2 U11.P$12 U11.P$13 U11.P$16
GND11: C12.1 JP35.2 U12.P$12 U12.P$13 U12.P$16
GND12: C13.1 JP38.2 U13.P$12 U13.P$13 U13.P$16
GND13: C14.1 JP41.2 U14.P$12 U14.P$13 U14.P$16
GND14: C15.1 JP44.2 U15.P$12 U15.P$13 U15.P$16
GND15: C16.1 JP47.2 U16.P$12 U16.P$13 U16.P$16
GND16: C17.1 JP50.2 U17.P$12 U17.P$13 U17.P$16
GND17: C18.1 JP53.2 U18.P$12 U18.P$13 U18.P$16
GND18: C19.1 JP56.2 U19.P$12 U19.P$13 U19.P$16
GND19: C20.1 JP59.2 U20.P$12 U20.P$13 U20.P$16
GND20: C21.1 JP62.2 U21.P$12 U21.P$13 U21.P$16
GND21: C22.1 JP65.2 U22.P$12 U22.P$13 U22.P$16
GND22: C23.1 JP68.2 U23.P$12 U23.P$13 U23.P$16
GND23: C24.1 JP71.2 U24.P$12 U24.P$13 U24.P$16
GND24: C25.1 JP74.2 U25.P$12 U25.P$13 U25.P$16
GND25: C26.1 JP77.2 U26.P$12 U26.P$13 U26.P$16
GND26: C27.1 JP80.2 U27.P$12 U27.P$13 U27.P$16
GND27: C28.1 JP83.2 U28.P$12 U28.P$13 U28.P$16
GND28: C29.1 JP86.2 U29.P$12 U29.P$13 U29.P$16
GND29: C30.1 JP89.2 U30.P$12 U30.P$13 U30.P$16
GND30: C31.1 JP92.2 U31.P$12 U31.P$13 U31.P$16
GND31: C32.1 JP95.2 U32.P$12 U32.P$13 U32.P$16
GND32: C33.1 JP98.2 U33.P$12 U33.P$13 U33.P$16
GND33: C34.1 JP101.2 U34.P$12 U34.P$13 U34.P$16
GND34: C35.1 JP104.2 U35.P$12 U35.P$13 U35.P$16
GND35: C36.1 JP107.2 U36.P$12 U36.P$13 U36.P$16
GND36: C37.1 JP110.2 U37.P$12 U37.P$13 U37.P$16
GND37: C38.1 JP113.2 U38.P$12 U38.P$13 U38.P$16
GND38: C39.1 JP116.2 U39.P$12 U39.P$13 U39.P$16
GND39: C40.1 JP119.2 U40.P$12 U40.P$13 U40.P$16
GND40: C41.1 JP122.2 U41.P$12 U41.P$13 U41.P$16
GND41: C42.1 JP125.2 U42.P$12 U42.P$13 U42.P$16
GND42: C43.1 JP128.2 U43.P$12 U43.P$13 U43.P$16
GND43: C44.1 JP131.2 U44.P$12 U44.P$13 U44.P$16
GND44: C45.1 JP134.2 U45.P$12 U45.P$13 U45.P$16
GND45: C46.1 JP137.2 U46.P$12 U46.P$13 U46.P$16
GND46: C47.1 JP140.2 U47.P$12 U47.P$13 U47.P$16
GND47: C48.1 JP143.2 U48.P$12 U48.P$13 U48.P$16
GND48: C49.1 JP146.2 U49.P$12 U49.P$13 U49.P$16
GND49: C50.1 JP149.2 U50.P$12 U50.P$13 U50.P$16
GND50: C51.1 JP152.2 U51.P$12 U51.P$13 U51.P$16
GND51: C52.1 JP155.2 U52.P$12 U52.P$13 U52.P$16
GND52: C53.1 JP158.2 U53.P$12 U53.P$13 U53.P$16
GND53: C54.1 JP161.2 U54.P$12 U54.P$13 U54.P$16
GND54: C55.1 JP164.2 U55.P$12 U55.P$13 U55.P$16
GND55: C56.1 JP167.2 U56.P$12 U56.P$13 U56.P$16
GND56: C57.1 JP170.2 U57.P$12 U57.P$13 U57.P$16
GND57: C58.1 JP173.2 U58.P$12 U58.P$13 U58.P$16
GND58: C59.1 JP176.2 U59.P$12 U59.P$13 U59.P$16
GND59: C60.1 JP179.2 U60.P$12 U60.P$13 U60.P$16
GND60: C61.1 JP182.2 U61.P$12 U61.P$13 U61.P$16
GND61: C62.1 JP185.2 U62.P$12 U62.P$13 U62.P$16
GND62: C63.1 JP188.2 U63.P$12 U63.P$13 U63.P$16
GND63: C64.1 JP191.2 U64.P$12 U64.P$13 U64.P$16
N$1: JP1.4 U1.P$4
N$2: JP1.3 U1.P$6
N$3: JP1.2 U1.P$7
N$4: JP1.1 U1.P$8
N$5: JP4.4 U2.P$4
N$6: JP4.3 U2.P$6
N$7: JP2.3 U1.P$11
N$8: JP2.4 U1.P$9
N$9: JP4.2 U2.P$7
N$10: JP4.1 U2.P$8
N$11: JP5.3 U2.P$11
N$12: JP5.4 U2.P$9
N$13: JP7.4 U3.P$4
N$14: JP7.3 U3.P$6
N$15: JP7.2 U3.P$7
N$16: JP7.1 U3.P$8
N$17: JP8.3 U3.P$11
N$18: JP8.4 U3.P$9
N$19: JP10.4 U4.P$4
N$20: JP10.3 U4.P$6
N$21: JP10.2 U4.P$7
N$22: JP10.1 U4.P$8
N$23: JP11.3 U4.P$11
N$24: JP11.4 U4.P$9
N$25: JP13.4 U5.P$4
N$26: JP13.3 U5.P$6
N$27: JP13.2 U5.P$7
N$28: JP13.1 U5.P$8
N$29: JP14.3 U5.P$11
N$30: JP14.4 U5.P$9
N$31: JP16.4 U6.P$4
N$32: JP16.3 U6.P$6
N$33: JP16.2 U6.P$7
N$34: JP16.1 U6.P$8
N$35: JP17.3 U6.P$11
N$36: JP17.4 U6.P$9
N$37: JP19.4 U7.P$4
N$38: JP19.3 U7.P$6
N$39: JP19.2 U7.P$7
N$40: JP19.1 U7.P$8
N$41: JP20.3 U7.P$11
N$42: JP20.4 U7.P$9
N$43: JP22.4 U8.P$4
N$44: JP22.3 U8.P$6
N$45: JP22.2 U8.P$7
N$46: JP22.1 U8.P$8
N$47: JP23.3 U8.P$11
N$48: JP23.4 U8.P$9
N$49: JP25.4 U9.P$4
N$50: JP25.3 U9.P$6
N$51: JP25.2 U9.P$7
N$52: JP25.1 U9.P$8
N$53: JP26.3 U9.P$11
N$54: JP26.4 U9.P$9
N$55: JP28.4 U10.P$4
N$56: JP28.3 U10.P$6
N$57: JP28.2 U10.P$7
N$58: JP28.1 U10.P$8
N$59: JP29.3 U10.P$11
N$60: JP29.4 U10.P$9
N$61: JP31.4 U11.P$4
N$62: JP31.3 U11.P$6
N$63: JP31.2 U11.P$7
N$64: JP31.1 U11.P$8
N$65: JP32.3 U11.P$11
N$66: JP32.4 U11.P$9
N$67: JP34.4 U12.P$4
N$68: JP34.3 U12.P$6
N$69: JP34.2 U12.P$7
N$70: JP34.1 U12.P$8
N$71: JP35.3 U12.P$11
N$72: JP35.4 U12.P$9
N$73: JP37.4 U13.P$4
N$74: JP37.3 U13.P$6
N$75: JP37.2 U13.P$7
N$76: JP37.1 U13.P$8
N$77: JP38.3 U13.P$11
N$78: JP38.4 U13.P$9
N$79: JP40.4 U14.P$4
N$80: JP40.3 U14.P$6
N$81: JP40.2 U14.P$7
N$82: JP40.1 U14.P$8
N$83: JP41.3 U14.P$11
N$84: JP41.4 U14.P$9
N$85: JP43.4 U15.P$4
N$86: JP43.3 U15.P$6
N$87: JP43.2 U15.P$7
N$88: JP43.1 U15.P$8
N$89: JP44.3 U15.P$11
N$90: JP44.4 U15.P$9
N$91: JP46.4 U16.P$4
N$92: JP46.3 U16.P$6
N$93: JP46.2 U16.P$7
N$94: JP46.1 U16.P$8
N$95: JP47.3 U16.P$11
N$96: JP47.4 U16.P$9
N$97: JP49.4 U17.P$4
N$98: JP49.3 U17.P$6
N$99: JP49.2 U17.P$7
N$100: JP49.1 U17.P$8
N$101: JP50.3 U17.P$11
N$102: JP50.4 U17.P$9
N$103: JP52.4 U18.P$4
N$104: JP52.3 U18.P$6
N$105: JP52.2 U18.P$7
N$106: JP52.1 U18.P$8
N$107: JP53.3 U18.P$11
N$108: JP53.4 U18.P$9
N$109: JP55.4 U19.P$4
N$110: JP55.3 U19.P$6
N$111: JP55.2 U19.P$7
N$112: JP55.1 U19.P$8
N$113: JP56.3 U19.P$11
N$114: JP56.4 U19.P$9
N$115: JP58.4 U20.P$4
N$116: JP58.3 U20.P$6
N$117: JP58.2 U20.P$7
N$118: JP58.1 U20.P$8
N$119: JP59.3 U20.P$11
N$120: JP59.4 U20.P$9
N$121: JP61.4 U21.P$4
N$122: JP61.3 U21.P$6
N$123: JP61.2 U21.P$7
N$124: JP61.1 U21.P$8
N$125: JP62.3 U21.P$11
N$126: JP62.4 U21.P$9
N$127: JP64.4 U22.P$4
N$128: JP64.3 U22.P$6
N$129: JP64.2 U22.P$7
N$130: JP64.1 U22.P$8
N$131: JP65.3 U22.P$11
N$132: JP65.4 U22.P$9
N$133: JP67.4 U23.P$4
N$134: JP67.3 U23.P$6
N$135: JP67.2 U23.P$7
N$136: JP67.1 U23.P$8
N$137: JP68.3 U23.P$11
N$138: JP68.4 U23.P$9
N$139: JP70.4 U24.P$4
N$140: JP70.3 U24.P$6
N$141: JP70.2 U24.P$7
N$142: JP70.1 U24.P$8
N$143: JP71.3 U24.P$11
N$144: JP71.4 U24.P$9
N$145: JP73.4 U25.P$4
N$146: JP73.3 U25.P$6
N$147: JP73.2 U25.P$7
N$148: JP73.1 U25.P$8
N$149: JP74.3 U25.P$11
N$150: JP74.4 U25.P$9
N$151: JP76.4 U26.P$4
N$152: JP76.3 U26.P$6
N$153: JP76.2 U26.P$7
N$154: JP76.1 U26.P$8
N$155: JP77.3 U26.P$11
N$156: JP77.4 U26.P$9
N$157: JP79.4 U27.P$4
N$158: JP79.3 U27.P$6
N$159: JP79.2 U27.P$7
N$160: JP79.1 U27.P$8
N$161: JP80.3 U27.P$11
N$162: JP80.4 U27.P$9
N$163: JP82.4 U28.P$4
N$164: JP82.3 U28.P$6
N$165: JP82.2 U28.P$7
N$166: JP82.1 U28.P$8
N$167: JP83.3 U28.P$11
N$168: JP83.4 U28.P$9
N$169: JP85.4 U29.P$4
N$170: JP85.3 U29.P$6
N$171: JP85.2 U29.P$7
N$172: JP85.1 U29.P$8
N$173: JP86.3 U29.P$11
N$174: JP86.4 U29.P$9
N$175: JP88.4 U30.P$4
N$176: JP88.3 U30.P$6
N$177: JP88.2 U30.P$7
N$178: JP88.1 U30.P$8
N$179: JP89.3 U30.P$11
N$180: JP89.4 U30.P$9
N$181: JP91.4 U31.P$4
N$182: JP91.3 U31.P$6
N$183: JP91.2 U31.P$7
N$184: JP91.1 U31.P$8
N$185: JP92.3 U31.P$11
N$186: JP92.4 U31.P$9
N$187: JP94.4 U32.P$4
N$188: JP94.3 U32.P$6
N$189: JP94.2 U32.P$7
N$190: JP94.1 U32.P$8
N$191: JP95.3 U32.P$11
N$192: JP95.4 U32.P$9
N$193: JP97.4 U33.P$4
N$194: JP97.3 U33.P$6
N$195: JP97.2 U33.P$7
N$196: JP97.1 U33.P$8
N$197: JP98.3 U33.P$11
N$198: JP98.4 U33.P$9
N$199: JP100.4 U34.P$4
N$200: JP100.3 U34.P$6
N$201: JP100.2 U34.P$7
N$202: JP100.1 U34.P$8
N$203: JP101.3 U34.P$11
N$204: JP101.4 U34.P$9
N$205: JP103.4 U35.P$4
N$206: JP103.3 U35.P$6
N$207: JP103.2 U35.P$7
N$208: JP103.1 U35.P$8
N$209: JP104.3 U35.P$11
N$210: JP104.4 U35.P$9
N$211: JP106.4 U36.P$4
N$212: JP106.3 U36.P$6
N$213: JP106.2 U36.P$7
N$214: JP106.1 U36.P$8
N$215: JP107.3 U36.P$11
N$216: JP107.4 U36.P$9
N$217: JP109.4 U37.P$4
N$218: JP109.3 U37.P$6
N$219: JP109.2 U37.P$7
N$220: JP109.1 U37.P$8
N$221: JP110.3 U37.P$11
N$222: JP110.4 U37.P$9
N$223: JP112.4 U38.P$4
N$224: JP112.3 U38.P$6
N$225: JP112.2 U38.P$7
N$226: JP112.1 U38.P$8
N$227: JP113.3 U38.P$11
N$228: JP113.4 U38.P$9
N$229: JP115.4 U39.P$4
N$230: JP115.3 U39.P$6
N$231: JP115.2 U39.P$7
N$232: JP115.1 U39.P$8
N$233: JP116.3 U39.P$11
N$234: JP116.4 U39.P$9
N$235: JP118.4 U40.P$4
N$236: JP118.3 U40.P$6
N$237: JP118.2 U40.P$7
N$238: JP118.1 U40.P$8
N$239: JP119.3 U40.P$11
N$240: JP119.4 U40.P$9
N$241: JP121.4 U41.P$4
N$242: JP121.3 U41.P$6
N$243: JP121.2 U41.P$7
N$244: JP121.1 U41.P$8
N$245: JP122.3 U41.P$11
N$246: JP122.4 U41.P$9
N$247: JP124.4 U42.P$4
N$248: JP124.3 U42.P$6
N$249: JP124.2 U42.P$7
N$250: JP124.1 U42.P$8
N$251: JP125.3 U42.P$11
N$252: JP125.4 U42.P$9
N$253: JP127.4 U43.P$4
N$254: JP127.3 U43.P$6
N$255: JP127.2 U43.P$7
N$256: JP127.1 U43.P$8
N$257: JP128.3 U43.P$11
N$258: JP128.4 U43.P$9
N$259: JP130.4 U44.P$4
N$260: JP130.3 U44.P$6
N$261: JP130.2 U44.P$7
N$262: JP130.1 U44.P$8
N$263: JP131.3 U44.P$11
N$264: JP131.4 U44.P$9
N$265: JP133.4 U45.P$4
N$266: JP133.3 U45.P$6
N$267: JP133.2 U45.P$7
N$268: JP133.1 U45.P$8
N$269: JP134.3 U45.P$11
N$270: JP134.4 U45.P$9
N$271: JP136.4 U46.P$4
N$272: JP136.3 U46.P$6
N$273: JP136.2 U46.P$7
N$274: JP136.1 U46.P$8
N$275: JP137.3 U46.P$11
N$276: JP137.4 U46.P$9
N$277: JP139.4 U47.P$4
N$278: JP139.3 U47.P$6
N$279: JP139.2 U47.P$7
N$280: JP139.1 U47.P$8
N$281: JP140.3 U47.P$11
N$282: JP140.4 U47.P$9
N$283: JP142.4 U48.P$4
N$284: JP142.3 U48.P$6
N$285: JP142.2 U48.P$7
N$286: JP142.1 U48.P$8
N$287: JP143.3 U48.P$11
N$288: JP143.4 U48.P$9
N$289: JP145.4 U49.P$4
N$290: JP145.3 U49.P$6
N$291: JP145.2 U49.P$7
N$292: JP145.1 U49.P$8
N$293: JP146.3 U49.P$11
N$294: JP146.4 U49.P$9
N$295: JP148.4 U50.P$4
N$296: JP148.3 U50.P$6
N$297: JP148.2 U50.P$7
N$298: JP148.1 U50.P$8
N$299: JP149.3 U50.P$11
N$300: JP149.4 U50.P$9
N$301: JP151.4 U51.P$4
N$302: JP151.3 U51.P$6
N$303: JP151.2 U51.P$7
N$304: JP151.1 U51.P$8
N$305: JP152.3 U51.P$11
N$306: JP152.4 U51.P$9
N$307: JP154.4 U52.P$4
N$308: JP154.3 U52.P$6
N$309: JP154.2 U52.P$7
N$310: JP154.1 U52.P$8
N$311: JP155.3 U52.P$11
N$312: JP155.4 U52.P$9
N$313: JP157.4 U53.P$4
N$314: JP157.3 U53.P$6
N$315: JP157.2 U53.P$7
N$316: JP157.1 U53.P$8
N$317: JP158.3 U53.P$11
N$318: JP158.4 U53.P$9
N$319: JP160.4 U54.P$4
N$320: JP160.3 U54.P$6
N$321: JP160.2 U54.P$7
N$322: JP160.1 U54.P$8
N$323: JP161.3 U54.P$11
N$324: JP161.4 U54.P$9
N$325: JP163.4 U55.P$4
N$326: JP163.3 U55.P$6
N$327: JP163.2 U55.P$7
N$328: JP163.1 U55.P$8
N$329: JP164.3 U55.P$11
N$330: JP164.4 U55.P$9
N$331: JP166.4 U56.P$4
N$332: JP166.3 U56.P$6
N$333: JP166.2 U56.P$7
N$334: JP166.1 U56.P$8
N$335: JP167.3 U56.P$11
N$336: JP167.4 U56.P$9
N$337: JP169.4 U57.P$4
N$338: JP169.3 U57.P$6
N$339: JP169.2 U57.P$7
N$340: JP169.1 U57.P$8
N$341: JP170.3 U57.P$11
N$342: JP170.4 U57.P$9
N$343: JP172.4 U58.P$4
N$344: JP172.3 U58.P$6
N$345: JP172.2 U58.P$7
N$346: JP172.1 U58.P$8
N$347: JP173.3 U58.P$11
N$348: JP173.4 U58.P$9
N$349: JP175.4 U59.P$4
N$350: JP175.3 U59.P$6
N$351: JP175.2 U59.P$7
N$352: JP175.1 U59.P$8
N$353: JP176.3 U59.P$11
N$354: JP176.4 U59.P$9
N$355: JP178.4 U60.P$4
N$356: JP178.3 U60.P$6
N$357: JP178.2 U60.P$7
N$358: JP178.1 U60.P$8
N$359: JP179.3 U60.P$11
N$360: JP179.4 U60.P$9
N$361: JP181.4 U61.P$4
N$362: JP181.3 U61.P$6
N$363: JP181.2 U61.P$7
N$364: JP181.1 U61.P$8
N$365: JP182.3 U61.P$11
N$366: JP182.4 U61.P$9
N$367: JP184.4 U62.P$4
N$368: JP184.3 U62.P$6
N$369: JP184.2 U62.P$7
N$370: JP184.1 U62.P$8
N$371: JP185.3 U62.P$11
N$372: JP185.4 U62.P$9
N$373: JP187.4 U63.P$4
N$374: JP187.3 U63.P$6
N$375: JP187.2 U63.P$7
N$376: JP187.1 U63.P$8
N$377: JP188.3 U63.P$11
N$378: JP188.4 U63.P$9
N$379: JP190.4 U64.P$4
N$380: JP190.3 U64.P$6
N$381: JP190.2 U64.P$7
N$382: JP190.1 U64.P$8
N$383: JP191.3 U64.P$11
N$384: JP191.4 U64.P$9

## Tracks (layer width: path | path; a pad name or v marks a point on that pad's centre or on a via)
3.3V
  Top 0.203: 14.06,15.75 11.18,15.75 10.67,15.24 10.67,13.21 10.94,12.94 U1.P$1 | 14.06,15.75 JP2.1 | 14.06,15.75 C1.2 13.97,14.64 13.97,14.1 13.71,13.84 U1.P$14
3.3V1
  Top 0.203: 27.27,15.75 24.38,15.75 23.88,15.24 23.88,13.21 24.15,12.94 U2.P$1 | 27.27,15.75 JP5.1 | 27.27,15.75 C2.2 27.18,14.64 27.18,14.1 26.92,13.84 U2.P$14
3.3V2
  Top 0.203: 40.47,15.75 37.59,15.75 37.08,15.24 37.08,13.21 37.35,12.94 U3.P$1 | 40.47,15.75 JP8.1 | 40.47,15.75 C3.2 40.39,14.64 40.39,14.1 40.12,13.84 U3.P$14
3.3V3
  Top 0.203: 53.68,15.75 50.8,15.75 50.29,15.24 50.29,13.21 50.56,12.94 U4.P$1 | 53.68,15.75 JP11.1 | 53.68,15.75 C4.2 53.59,14.64 53.59,14.1 53.33,13.84 U4.P$14
3.3V4
  Top 0.203: 66.89,15.75 64.01,15.75 63.5,15.24 63.5,13.21 63.77,12.94 U5.P$1 | 66.89,15.75 JP14.1 | 66.89,15.75 C5.2 66.8,14.64 66.8,14.1 66.54,13.84 U5.P$14
3.3V5
  Top 0.203: 80.1,15.75 77.22,15.75 76.71,15.24 76.71,13.21 76.98,12.94 U6.P$1 | 80.1,15.75 JP17.1 | 80.1,15.75 C6.2 80.01,14.64 80.01,14.1 79.75,13.84 U6.P$14
3.3V6
  Top 0.203: 93.31,15.75 90.42,15.75 89.92,15.24 89.92,13.21 90.19,12.94 U7.P$1 | 93.31,15.75 JP20.1 | 93.31,15.75 C7.2 93.22,14.64 93.22,14.1 92.96,13.84 U7.P$14
3.3V7
  Top 0.203: 106.51,15.75 103.63,15.75 103.12,15.24 103.12,13.21 103.39,12.94 U8.P$1 | 106.51,15.75 JP23.1 | 106.51,15.75 C8.2 106.43,14.64 106.43,14.1 106.16,13.84 U8.P$14
3.3V8
  Top 0.203: 14.06,26.42 11.18,26.42 10.67,25.91 10.67,23.88 10.94,23.61 U9.P$1 | 14.06,26.42 JP26.1 | 14.06,26.42 C9.2 13.97,25.31 13.97,24.77 13.71,24.5 U9.P$14
3.3V9
  Top 0.203: 27.27,26.42 24.38,26.42 23.88,25.91 23.88,23.88 24.15,23.61 U10.P$1 | 27.27,26.42 JP29.1 | 27.27,26.42 C10.2 27.18,25.31 27.18,24.77 26.92,24.5 U10.P$14
3.3V10
  Top 0.203: 40.47,26.42 37.59,26.42 37.08,25.91 37.08,23.88 37.35,23.61 U11.P$1 | 40.47,26.42 JP32.1 | 40.47,26.42 C11.2 40.39,25.31 40.39,24.77 40.12,24.5 U11.P$14
3.3V11
  Top 0.203: 53.68,26.42 50.8,26.42 50.29,25.91 50.29,23.88 50.56,23.61 U12.P$1 | 53.68,26.42 JP35.1 | 53.68,26.42 C12.2 53.59,25.31 53.59,24.77 53.33,24.5 U12.P$14
3.3V12
  Top 0.203: 66.89,26.42 64.01,26.42 63.5,25.91 63.5,23.88 63.77,23.61 U13.P$1 | 66.89,26.42 JP38.1 | 66.89,26.42 C13.2 66.8,25.31 66.8,24.77 66.54,24.5 U13.P$14
3.3V13
  Top 0.203: 80.1,26.42 77.22,26.42 76.71,25.91 76.71,23.88 76.98,23.61 U14.P$1 | 80.1,26.42 JP41.1 | 80.1,26.42 C14.2 80.01,25.31 80.01,24.77 79.75,24.5 U14.P$14
3.3V14
  Top 0.203: 93.31,26.42 90.42,26.42 89.92,25.91 89.92,23.88 90.19,23.61 U15.P$1 | 93.31,26.42 JP44.1 | 93.31,26.42 C15.2 93.22,25.31 93.22,24.77 92.96,24.5 U15.P$14
3.3V15
  Top 0.203: 106.51,26.42 103.63,26.42 103.12,25.91 103.12,23.88 103.39,23.61 U16.P$1 | 106.51,26.42 JP47.1 | 106.51,26.42 C16.2 106.43,25.31 106.43,24.77 106.16,24.5 U16.P$14
3.3V16
  Top 0.203: 14.06,37.08 11.18,37.08 10.67,36.58 10.67,34.54 10.94,34.27 U17.P$1 | 14.06,37.08 JP50.1 | 14.06,37.08 C17.2 13.97,35.98 13.97,35.43 13.71,35.17 U17.P$14
3.3V17
  Top 0.203: 27.27,37.08 24.38,37.08 23.88,36.58 23.88,34.54 24.15,34.27 U18.P$1 | 27.27,37.08 JP53.1 | 27.27,37.08 C18.2 27.18,35.98 27.18,35.43 26.92,35.17 U18.P$14
3.3V18
  Top 0.203: 40.47,37.08 37.59,37.08 37.08,36.58 37.08,34.54 37.35,34.27 U19.P$1 | 40.47,37.08 JP56.1 | 40.47,37.08 C19.2 40.39,35.98 40.39,35.43 40.12,35.17 U19.P$14
3.3V19
  Top 0.203: 53.68,37.08 50.8,37.08 50.29,36.58 50.29,34.54 50.56,34.27 U20.P$1 | 53.68,37.08 JP59.1 | 53.68,37.08 C20.2 53.59,35.98 53.59,35.43 53.33,35.17 U20.P$14
3.3V20
  Top 0.203: 66.89,37.08 64.01,37.08 63.5,36.58 63.5,34.54 63.77,34.27 U21.P$1 | 66.89,37.08 JP62.1 | 66.89,37.08 C21.2 66.8,35.98 66.8,35.43 66.54,35.17 U21.P$14
3.3V21
  Top 0.203: 80.1,37.08 77.22,37.08 76.71,36.58 76.71,34.54 76.98,34.27 U22.P$1 | 80.1,37.08 JP65.1 | 80.1,37.08 C22.2 80.01,35.98 80.01,35.43 79.75,35.17 U22.P$14
3.3V22
  Top 0.203: 93.31,37.08 90.42,37.08 89.92,36.58 89.92,34.54 90.19,34.27 U23.P$1 | 93.31,37.08 JP68.1 | 93.31,37.08 C23.2 93.22,35.98 93.22,35.43 92.96,35.17 U23.P$14
3.3V23
  Top 0.203: 106.51,37.08 103.63,37.08 103.12,36.58 103.12,34.54 103.39,34.27 U24.P$1 | 106.51,37.08 JP71.1 | 106.51,37.08 C24.2 106.43,35.98 106.43,35.43 106.16,35.17 U24.P$14
3.3V24
  Top 0.203: 14.06,47.75 11.18,47.75 10.67,47.24 10.67,45.21 10.94,44.94 U25.P$1 | 14.06,47.75 JP74.1 | 14.06,47.75 C25.2 13.97,46.65 13.97,46.1 13.71,45.84 U25.P$14
3.3V25
  Top 0.203: 27.27,47.75 24.38,47.75 23.88,47.24 23.88,45.21 24.15,44.94 U26.P$1 | 27.27,47.75 JP77.1 | 27.27,47.75 C26.2 27.18,46.65 27.18,46.1 26.92,45.84 U26.P$14
3.3V26
  Top 0.203: 40.47,47.75 37.59,47.75 37.08,47.24 37.08,45.21 37.35,44.94 U27.P$1 | 40.47,47.75 JP80.1 | 40.47,47.75 C27.2 40.39,46.65 40.39,46.1 40.12,45.84 U27.P$14
3.3V27
  Top 0.203: 53.68,47.75 50.8,47.75 50.29,47.24 50.29,45.21 50.56,44.94 U28.P$1 | 53.68,47.75 JP83.1 | 53.68,47.75 C28.2 53.59,46.65 53.59,46.1 53.33,45.84 U28.P$14
3.3V28
  Top 0.203: 66.89,47.75 64.01,47.75 63.5,47.24 63.5,45.21 63.77,44.94 U29.P$1 | 66.89,47.75 JP86.1 | 66.89,47.75 C29.2 66.8,46.65 66.8,46.1 66.54,45.84 U29.P$14
3.3V29
  Top 0.203: 80.1,47.75 77.22,47.75 76.71,47.24 76.71,45.21 76.98,44.94 U30.P$1 | 80.1,47.75 JP89.1 | 80.1,47.75 C30.2 80.01,46.65 80.01,46.1 79.75,45.84 U30.P$14
3.3V30
  Top 0.203: 93.31,47.75 90.42,47.75 89.92,47.24 89.92,45.21 90.19,44.94 U31.P$1 | 93.31,47.75 JP92.1 | 93.31,47.75 C31.2 93.22,46.65 93.22,46.1 92.96,45.84 U31.P$14
3.3V31
  Top 0.203: 106.51,47.75 103.63,47.75 103.12,47.24 103.12,45.21 103.39,44.94 U32.P$1 | 106.51,47.75 JP95.1 | 106.51,47.75 C32.2 106.43,46.65 106.43,46.1 106.16,45.84 U32.P$14
3.3V32
  Top 0.203: 14.06,58.42 11.18,58.42 10.67,57.91 10.67,55.88 10.94,55.61 U33.P$1 | 14.06,58.42 JP98.1 | 14.06,58.42 C33.2 13.97,57.32 13.97,56.77 13.71,56.51 U33.P$14
3.3V33
  Top 0.203: 27.27,58.42 24.38,58.42 23.88,57.91 23.88,55.88 24.15,55.61 U34.P$1 | 27.27,58.42 JP101.1 | 27.27,58.42 C34.2 27.18,57.32 27.18,56.77 26.92,56.51 U34.P$14
3.3V34
  Top 0.203: 40.47,58.42 37.59,58.42 37.08,57.91 37.08,55.88 37.35,55.61 U35.P$1 | 40.47,58.42 JP104.1 | 40.47,58.42 C35.2 40.39,57.32 40.39,56.77 40.12,56.51 U35.P$14
3.3V35
  Top 0.203: 53.68,58.42 50.8,58.42 50.29,57.91 50.29,55.88 50.56,55.61 U36.P$1 | 53.68,58.42 JP107.1 | 53.68,58.42 C36.2 53.59,57.32 53.59,56.77 53.33,56.51 U36.P$14
3.3V36
  Top 0.203: 66.89,58.42 64.01,58.42 63.5,57.91 63.5,55.88 63.77,55.61 U37.P$1 | 66.89,58.42 JP110.1 | 66.89,58.42 C37.2 66.8,57.32 66.8,56.77 66.54,56.51 U37.P$14
3.3V37
  Top 0.203: 80.1,58.42 77.22,58.42 76.71,57.91 76.71,55.88 76.98,55.61 U38.P$1 | 80.1,58.42 JP113.1 | 80.1,58.42 C38.2 80.01,57.32 80.01,56.77 79.75,56.51 U38.P$14
3.3V38
  Top 0.203: 93.31,58.42 90.42,58.42 89.92,57.91 89.92,55.88 90.19,55.61 U39.P$1 | 93.31,58.42 JP116.1 | 93.31,58.42 C39.2 93.22,57.32 93.22,56.77 92.96,56.51 U39.P$14
3.3V39
  Top 0.203: 106.51,58.42 103.63,58.42 103.12,57.91 103.12,55.88 103.39,55.61 U40.P$1 | 106.51,58.42 JP119.1 | 106.51,58.42 C40.2 106.43,57.32 106.43,56.77 106.16,56.51 U40.P$14
3.3V40
  Top 0.203: 14.06,69.09 11.18,69.09 10.67,68.58 10.67,66.55 10.94,66.28 U41.P$1 | 14.06,69.09 JP122.1 | 14.06,69.09 C41.2 13.97,67.98 13.97,67.44 13.71,67.17 U41.P$14
3.3V41
  Top 0.203: 27.27,69.09 24.38,69.09 23.88,68.58 23.88,66.55 24.15,66.28 U42.P$1 | 27.27,69.09 JP125.1 | 27.27,69.09 C42.2 27.18,67.98 27.18,67.44 26.92,67.17 U42.P$14
3.3V42
  Top 0.203: 40.47,69.09 37.59,69.09 37.08,68.58 37.08,66.55 37.35,66.28 U43.P$1 | 40.47,69.09 JP128.1 | 40.47,69.09 C43.2 40.39,67.98 40.39,67.44 40.12,67.17 U43.P$14
3.3V43
  Top 0.203: 53.68,69.09 50.8,69.09 50.29,68.58 50.29,66.55 50.56,66.28 U44.P$1 | 53.68,69.09 JP131.1 | 53.68,69.09 C44.2 53.59,67.98 53.59,67.44 53.33,67.17 U44.P$14
3.3V44
  Top 0.203: 66.89,69.09 64.01,69.09 63.5,68.58 63.5,66.55 63.77,66.28 U45.P$1 | 66.89,69.09 JP134.1 | 66.89,69.09 C45.2 66.8,67.98 66.8,67.44 66.54,67.17 U45.P$14
3.3V45
  Top 0.203: 80.1,69.09 77.22,69.09 76.71,68.58 76.71,66.55 76.98,66.28 U46.P$1 | 80.1,69.09 JP137.1 | 80.1,69.09 C46.2 80.01,67.98 80.01,67.44 79.75,67.17 U46.P$14
3.3V46
  Top 0.203: 93.31,69.09 90.42,69.09 89.92,68.58 89.92,66.55 90.19,66.28 U47.P$1 | 93.31,69.09 JP140.1 | 93.31,69.09 C47.2 93.22,67.98 93.22,67.44 92.96,67.17 U47.P$14
3.3V47
  Top 0.203: 106.51,69.09 103.63,69.09 103.12,68.58 103.12,66.55 103.39,66.28 U48.P$1 | 106.51,69.09 JP143.1 | 106.51,69.09 C48.2 106.43,67.98 106.43,67.44 106.16,67.17 U48.P$14
3.3V48
  Top 0.203: 14.06,79.76 11.18,79.76 10.67,79.25 10.67,77.22 10.94,76.95 U49.P$1 | 14.06,79.76 JP146.1 | 14.06,79.76 C49.2 13.97,78.65 13.97,78.11 13.71,77.84 U49.P$14
3.3V49
  Top 0.203: 27.27,79.76 24.38,79.76 23.88,79.25 23.88,77.22 24.15,76.95 U50.P$1 | 27.27,79.76 JP149.1 | 27.27,79.76 C50.2 27.18,78.65 27.18,78.11 26.92,77.84 U50.P$14
3.3V50
  Top 0.203: 40.47,79.76 37.59,79.76 37.08,79.25 37.08,77.22 37.35,76.95 U51.P$1 | 40.47,79.76 JP152.1 | 40.47,79.76 C51.2 40.39,78.65 40.39,78.11 40.12,77.84 U51.P$14
3.3V51
  Top 0.203: 53.68,79.76 50.8,79.76 50.29,79.25 50.29,77.22 50.56,76.95 U52.P$1 | 53.68,79.76 JP155.1 | 53.68,79.76 C52.2 53.59,78.65 53.59,78.11 53.33,77.84 U52.P$14
3.3V52
  Top 0.203: 66.89,79.76 64.01,79.76 63.5,79.25 63.5,77.22 63.77,76.95 U53.P$1 | 66.89,79.76 JP158.1 | 66.89,79.76 C53.2 66.8,78.65 66.8,78.11 66.54,77.84 U53.P$14
3.3V53
  Top 0.203: 80.1,79.76 77.22,79.76 76.71,79.25 76.71,77.22 76.98,76.95 U54.P$1 | 80.1,79.76 JP161.1 | 80.1,79.76 C54.2 80.01,78.65 80.01,78.11 79.75,77.84 U54.P$14
3.3V54
  Top 0.203: 93.31,79.76 90.42,79.76 89.92,79.25 89.92,77.22 90.19,76.95 U55.P$1 | 93.31,79.76 JP164.1 | 93.31,79.76 C55.2 93.22,78.65 93.22,78.11 92.96,77.84 U55.P$14
3.3V55
  Top 0.203: 106.51,79.76 103.63,79.76 103.12,79.25 103.12,77.22 103.39,76.95 U56.P$1 | 106.51,79.76 JP167.1 | 106.51,79.76 C56.2 106.43,78.65 106.43,78.11 106.16,77.84 U56.P$14
3.3V56
  Top 0.203: 14.06,90.42 11.18,90.42 10.67,89.92 10.67,87.88 10.94,87.61 U57.P$1 | 14.06,90.42 JP170.1 | 14.06,90.42 C57.2 13.97,89.32 13.97,88.77 13.71,88.51 U57.P$14
3.3V57
  Top 0.203: 27.27,90.42 24.38,90.42 23.88,89.92 23.88,87.88 24.15,87.61 U58.P$1 | 27.27,90.42 JP173.1 | 27.27,90.42 C58.2 27.18,89.32 27.18,88.77 26.92,88.51 U58.P$14
3.3V58